# Altium PCB PCB_Retro-Styled-Macropad-(1990's-themed)_2026-08-07.pcbdoc
Units mil, origin at the board's own origin, x right, y up, seen from the top; angles counter-clockwise.
Board outline 7755 x 7170 mil, 2 copper layers (Top Layer, Bottom Layer); 9 components, 45 nets, 80 pads, 9 vias.
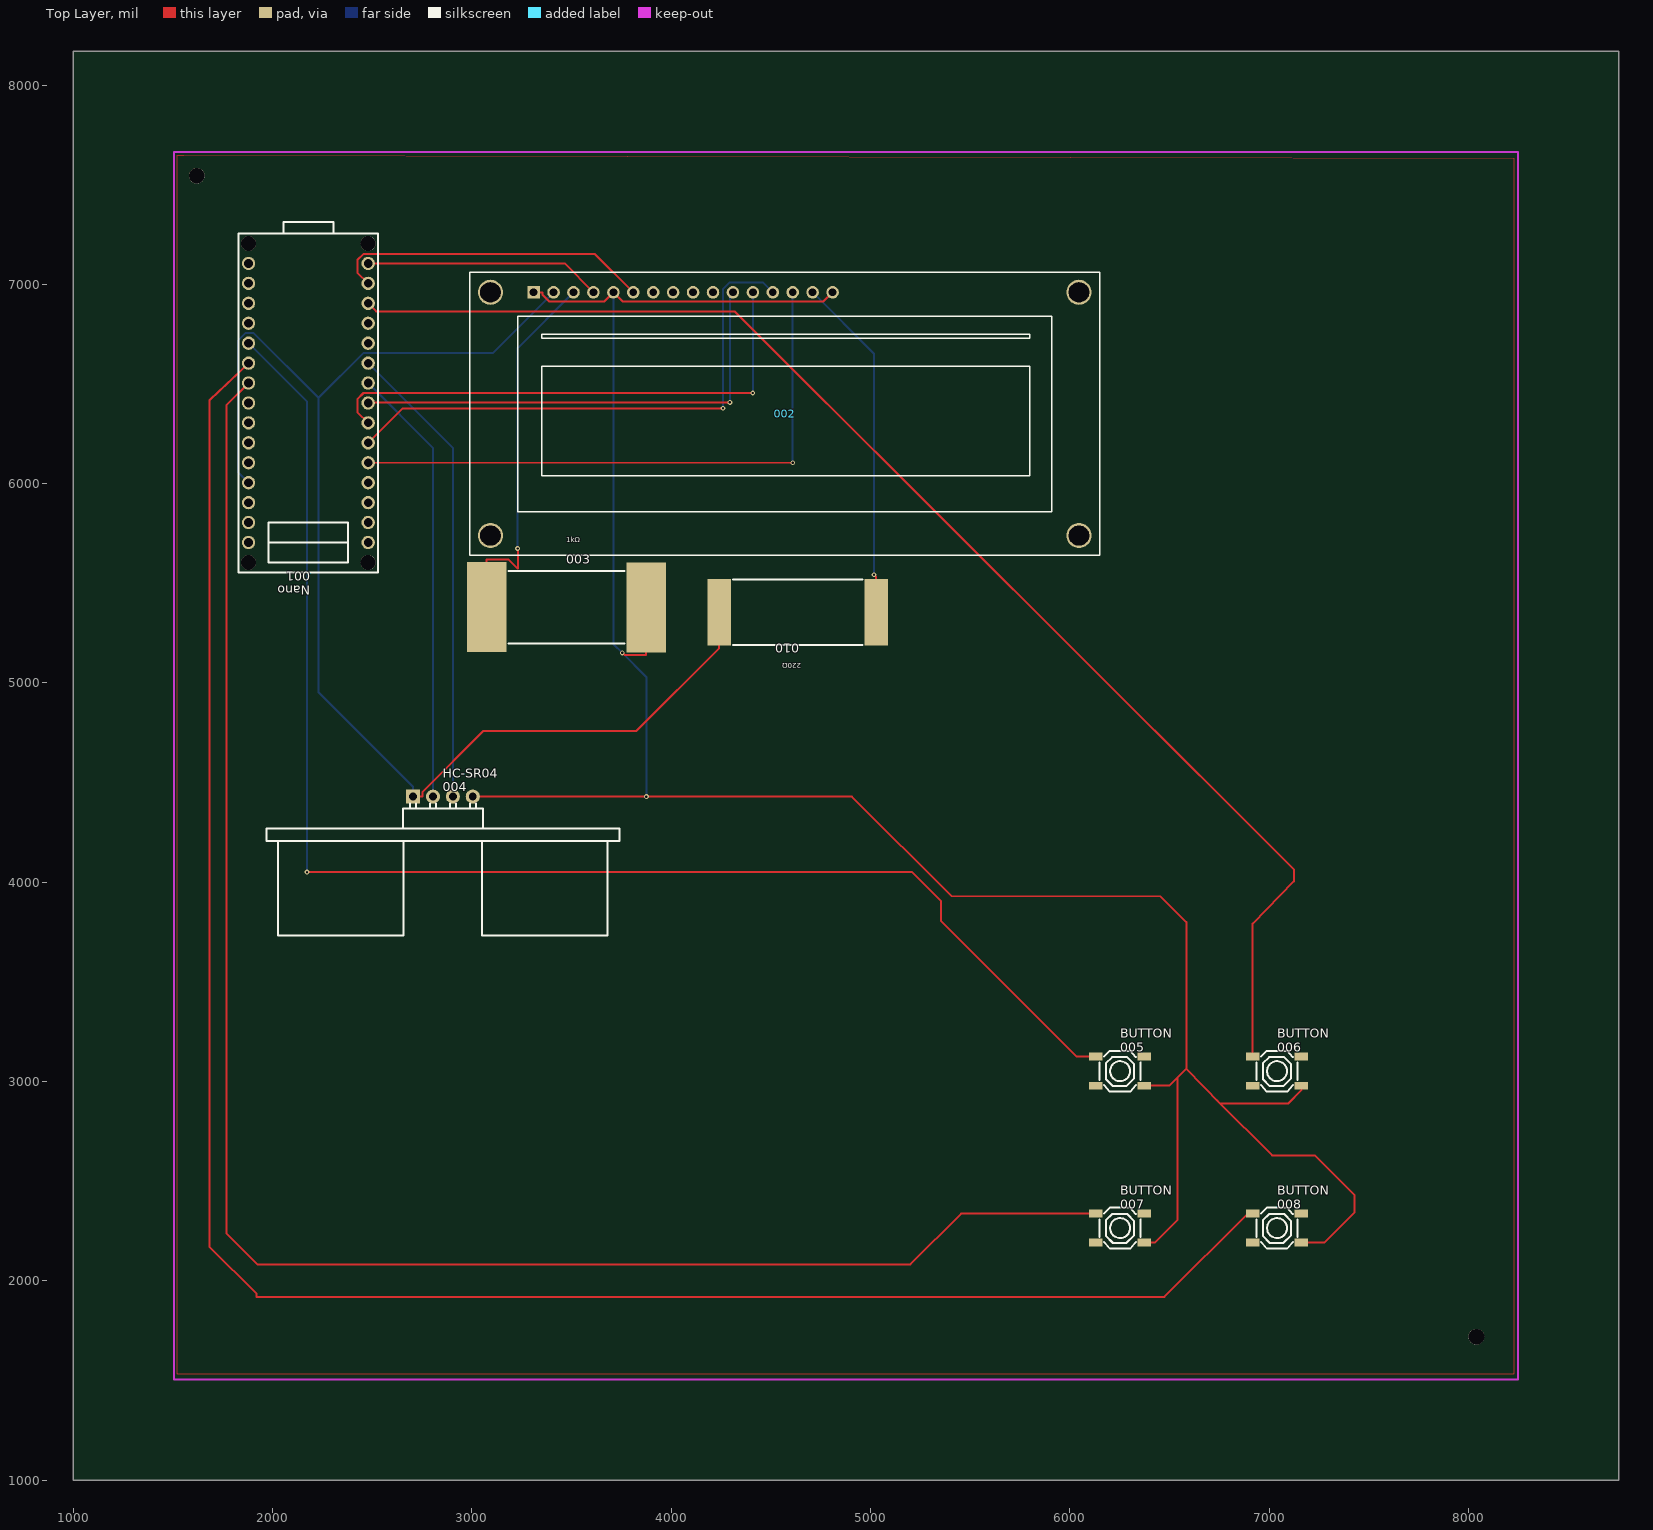
[diagram p0: Top Layer view]
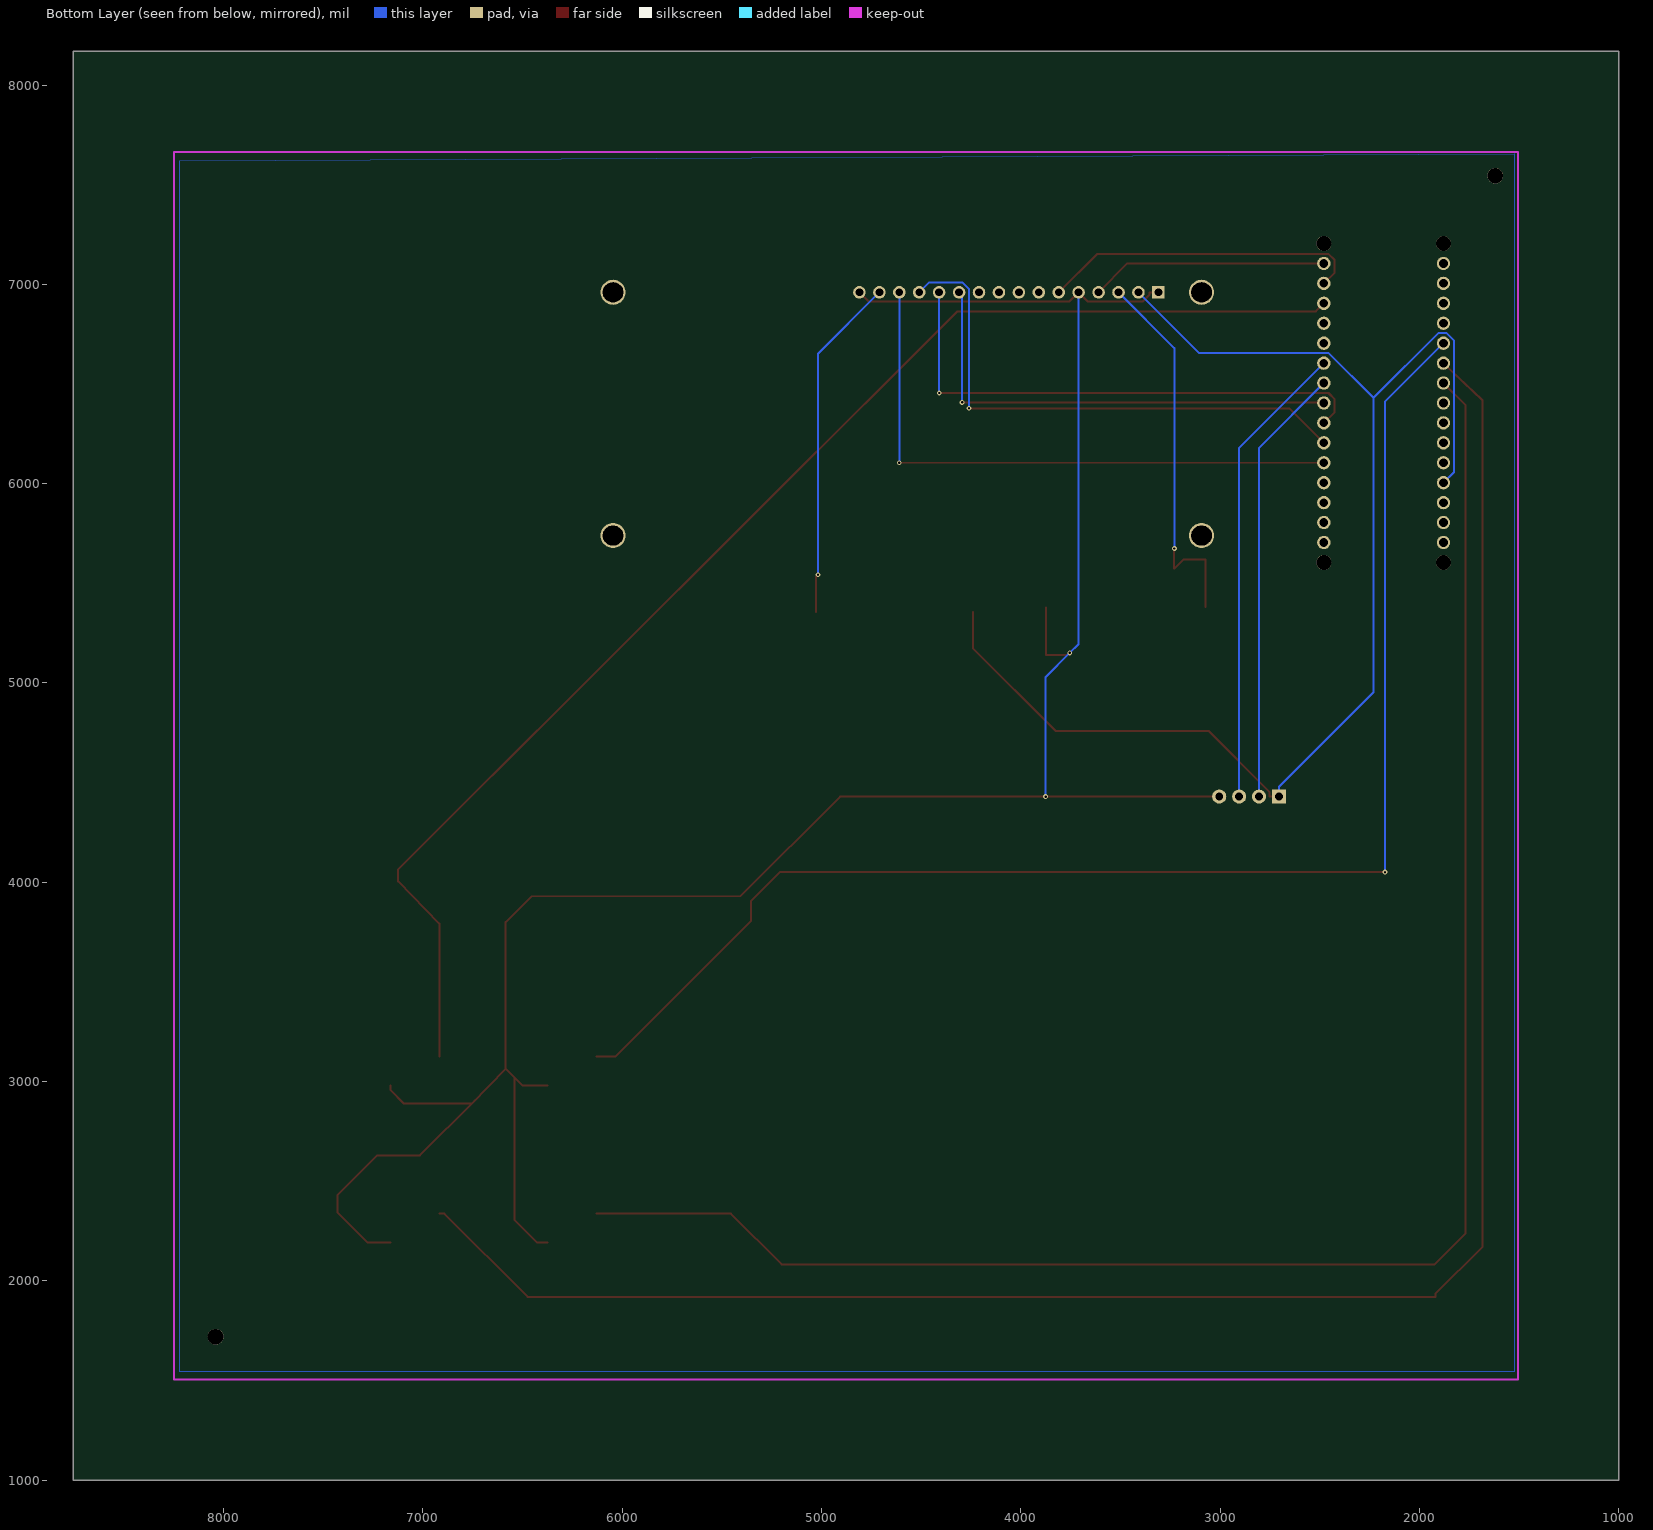
[diagram p1: Bottom Layer view, seen from below]

## Layer stack, top to bottom
Top Layer: signal copper (thickness not stored)
Dielectric: dielectric 12.6, FR-4, Dk 4.8
Bottom Layer: signal copper (thickness not stored)

## Board outline
8755,1000 1000,1000 1000,8170 8755,8170

## Components (designator, comment, footprint, x,y, rotation, side; value= is the part's Value field where it differs from the comment)
001 "Nano" COMM-TH_L43.2-W17.8-P2.54_ATMEGA328P 2180,6405 r180 top
002 "LCD1602" LCD1602 4570,6350 r0 top
003 "1kΩ" RES-SMD_L20.5-W9.3 3475,5380 r0 top
004 "HC-SR04" TH_HC-SR04V 2855,4430 r0 top
005 "BUTTON" SW-SMD_4P-L5.1-W5.1-P3.70-LS6.5-TL-2 6252.6,3052.4 r0 top
006 "BUTTON" SW-SMD_4P-L5.1-W5.1-P3.70-LS6.5-TL-2 7040,3052.4 r0 top
007 "BUTTON" SW-SMD_4P-L5.1-W5.1-P3.70-LS6.5-TL-2 6252.6,2265 r0 top
008 "BUTTON" SW-SMD_4P-L5.1-W5.1-P3.70-LS6.5-TL-2 7040,2265 r0 top
010 "220Ω" RES-SMD_L21.0-W8.0 4635,5355 r180 top

## Footprints (in the part's own frame and the unit in brackets; to place one, negate y for a bottom-side part, rotate by r counter-clockwise, add the part's x,y. Pads: shape width x height; smd on the part's side, far side on the other; paste and mask are expansions set on the pad)
COMM-TH_L43.2-W17.8-P2.54_ATMEGA328P [mm]
  round 1.7 hole 1.1 paste+0 mask+0.051: 1(-7.62,17.78) 2(-7.62,15.24) 3(-7.62,12.7) 4(-7.62,10.16) 5(-7.62,7.62) 6(-7.62,5.08) 7(-7.62,2.54) 8(-7.62,0) 9(-7.62,-2.54) 10(-7.62,-5.08) 11(-7.62,-7.62) 12(-7.62,-10.16) 13(-7.62,-12.7) 14(-7.62,-15.24) 15(-7.62,-17.78) 16(7.62,-17.78) 17(7.62,-15.24) 18(7.62,-12.7) 19(7.62,-10.16) 20(7.62,-7.62) 21(7.62,-5.08) 22(7.62,-2.54) 23(7.62,0) 24(7.62,2.54) 25(7.62,5.08) 26(7.62,7.62) 27(7.62,10.16) 28(7.62,12.7) 29(7.62,15.24) 30(7.62,17.78)
  round 1.9 hole 1.9 unplated paste+0: ""(-7.62,20.32) ""(-7.62,-20.32) ""(7.62,20.32) ""(7.62,-20.32)
  silkscreen extent -8.89,-23.04 8.89,21.59
LCD1602 [mm]
  round 3.2 hole 2.5 slot 2.625 at 0 deg paste+0 mask+0.051: 0(-37.5,-15.5) 0(-37.5,15.5) 0(37.5,-15.5) 0(37.5,15.5)
  rect 1.6x1.6 hole 1 paste+0 mask+0.051: 1(-32,15.5)
  round 1.6 hole 1 paste+0 mask+0.051: 2(-29.46,15.5) 3(-26.92,15.5) 4(-24.38,15.5) 5(-21.84,15.5) 6(-19.3,15.5) 7(-16.76,15.5) 8(-14.22,15.5) 9(-11.68,15.5) 10(-9.14,15.5) 11(-6.6,15.5) 12(-4.06,15.5) 13(-1.52,15.5) 14(1.02,15.5) 15(3.56,15.5) 16(6.1,15.5)
  silkscreen extent -40.13,-18.03 40.13,18.03
RES-SMD_L20.5-W9.3 [mil]
  rect 200x450 smd paste+0 mask+1.97: 1(-400,1.25) 2(400,-1.25)
  silkscreen extent -291,-182 291,182
RES-SMD_L21.0-W8.0 [mm]
  rect 3x8.5 smd paste+0 mask+0.051: 1(-10,0) 2(10,0)
  silkscreen extent -8.27,-4.19 8.27,4.19
SW-SMD_4P-L5.1-W5.1-P3.70-LS6.5-TL-2 [mm]
  rect 1.7x1 smd paste+0 mask+0.051: 1(-3.1,1.85) 2(3.1,1.85) 3(-3.1,-1.85) 4(3.1,-1.85)
  silkscreen extent -2.6,-2.6 2.6,2.6
TH_HC-SR04V [mm]
  rect 1.8x1.8 hole 1.001 paste+0 mask+0.051: 1(-3.81,0)
  round 1.8 hole 1.001 paste+0 mask+0.051: 2(-1.27,0) 3(1.27,0) 4(3.81,0)
  silkscreen extent -22.5,-17.7 22.5,-0.89

## Free pads (board coordinates)
  round 80 hole 80 unplated paste+0: ""(1620,7545) ""(8040,1720)

## Via types
v1: diameter 24.02, hole 12.01, Top Layer to Bottom Layer, tented both sides, 9 vias

## Nets (pads, with @x,y where several pads share a name; then routed paths per layer and width w, separated by ;. In a path a pad name is that pad's centre, name@x,y a point inside that pad or via, vN(x,y) a via of type N, cw(c..) or ccw(c..) an arc to the next point about the centre after c; other vN are vias at no path point)
001_1: 001.1
001_2: 001.2
001_3: 001.3
001_4: 001.4
001_5: 001.5 002.14 | length 2985.4
  Top Layer w10: 001.5 v1(4610.16,6105)
  Bottom Layer w10: v1(4610.16,6105) 002.14
001_6: 001.6 002.13 | length 2734.8
  Top Layer w10: 001.6 2653.2,6378.2 v1(4260.16,6378.2)
  Bottom Layer w10: v1(4260.16,6378.2) 4260.16,6976.34 4294.09,7010.27 4460.13,7010.27 002.13
001_7: 001.7 002.12 | length 2643.4
  Top Layer w10: 001.7 2426.4,6358.6 2426.4,6424.63 2456.77,6455 v1(4410.16,6455)
  Bottom Layer w10: v1(4410.16,6455) 002.12
001_8: 001.8 002.11 | length 2374.9
  Top Layer w10: 001.8 2482.67,6407.67 v1(4294.89,6407.67)
  Bottom Layer w10: v1(4294.89,6407.67) 4294.89,6944.97 002.11
001_9: 001.9 004.2 | length 2209.6
  Bottom Layer w10: 001.9 2805,6180 004.2
001_10: 001.10 004.3 | length 2351
  Bottom Layer w10: 001.10 2905,6180 004.3
001_11: 001.11
001_12: 001.12
001_13: 001.13 006.1 | length 6843.4
  Top Layer w10: 001.13 2520.11,6864.89 4318.05,6864.89 7125,4065 7125,4005 6917.95,3792.95 006.1
001_14: 001.14 002.6 | length 1615.2
  Top Layer w10: 001.14 2426.4,7058.6 2426.4,7122.36 2456.25,7152.21 3618.19,7152.21 002.6
001_15: 001.15 002.4 | length 1190.1
  Top Layer w10: 001.15 3465.4,7105 002.4
001_16: 001.16
001_17: 001.17
001_18: 001.18
001_19: 001.19
001_20: 001.20 005.1 | length 7175
  Top Layer w10: v1(2173.33,4051.34) 5209.45,4051.34 5355,3905.79 5355,3805 6034.76,3125.24 005.1
  Bottom Layer w10: 001.20 2173.33,6411.67 v1(2173.33,4051.34)
001_21: 001.21 008.1 | length 10037.1
  Top Layer w10: 001.21 1685,6420 1685,6415 1685,2170 1920,1935 1920,1920 6475,1920 6892.8,2337.8 008.1@6917.9,2337.8
001_22: 001.22 007.1 | length 8843.5
  Top Layer w10: 001.22 1770,6395 1770,2237.3 1924.4,2082.8 5200.52,2082.8 5455.56,2337.84 007.1
001_23: 001.23
001_24: 001.24
001_25: 001.25
001_26: 001.26
001_27: 001.27 002.2 004.1 010.2 | length 6923.5
  Top Layer w10: 004.1 2753.32,4430 2753.32,4454.16 3058.37,4759.21 3825.72,4759.21 4241.3,5174.79 010.2
  Bottom Layer w10: 001.27 1826.4,6058.6 1826.4,6716.99 1864.41,6755 1905.96,6755 2230.89,6430.07 ; 004.1 2705,4478.32 2230.89,4952.43 2230.89,6430.07 ; 002.2 3104.92,6655 2455.82,6655 2230.89,6430.07
001_28: 001.28
001_29: 002.1 002.5 002.16 003.2 004.4 005.4 006.4 007.4 008.4 | length 12296.3
  Top Layer w10: 004.4 v1(3875.97,4430) ; 002.1 3354.55,6960.24 3354.55,6949.14 3389.67,6914.02 3663.94,6914.02 002.5 3756.33,6914.07 4763.99,6914.07 002.16 ; v1(3755.05,5150.83) 3765.02,5140.86 3875,5140.86 003.2 ; v1(3875.97,4430) 4907.3,4430 5407.2,3930 6455,3930 6585,3800 6585,3065 ; 005.4 6500,2980 6585,3065 ; 007.4 6427.16,2192.16 6540,2305 6540,3020 ; 6740.57,2904.86 7015.42,2630 7230,2630 7430,2430 7430,2345 7277.16,2192.16 008.4 ; 006.4@7162.1,2979.6 7162.1,2957.1 7095,2890 6755,2890 6585,3065
  Bottom Layer w10: 002.5 3710.16,5195.72 v1(3755.05,5150.83) 3875.96,5029.92 v1(3875.97,4430)
001_30: 001.30
002_3: 002.3 003.1 | length 1915.9
  Top Layer w10: 003.1 3075,5619.14 3184.98,5619.14 3230.64,5573.48 3230.64,5675 v1(3230,5675)
  Bottom Layer w10: v1(3230,5675) 3230,6680.08 002.3
002_7: 002.7
002_8: 002.8
002_9: 002.9
002_10: 002.10
002_15: 002.15 010.1 | length 1739
  Top Layer w10: v1(5017.89,5542.85) 5025.53,5535.21 5028.7,5535.21 010.1
  Bottom Layer w10: 002.15 5017.89,6652.51 v1(5017.89,5542.85)
005_2: 005.2
005_3: 005.3
006_2: 006.2
006_3: 006.3
007_2: 007.2
007_3: 007.3
008_2: 008.2
008_3: 008.3
GND: 001.29
pads on no net: 001. 002.0

## Polygon pours and split planes (outlines as drawn)
GND on Bottom Layer (solid): 1525,7655 1525,1545 1590,1545 8220,1545 8220,7620 1525,7655
GND on Top Layer (solid): 1520,7645 1520,1535 1530,1535 8230,1535 8230,7630 1555,7645 1520,7645